# EAGLE board robert sullivan zoetrope brd (EAGLE 9.2.2)
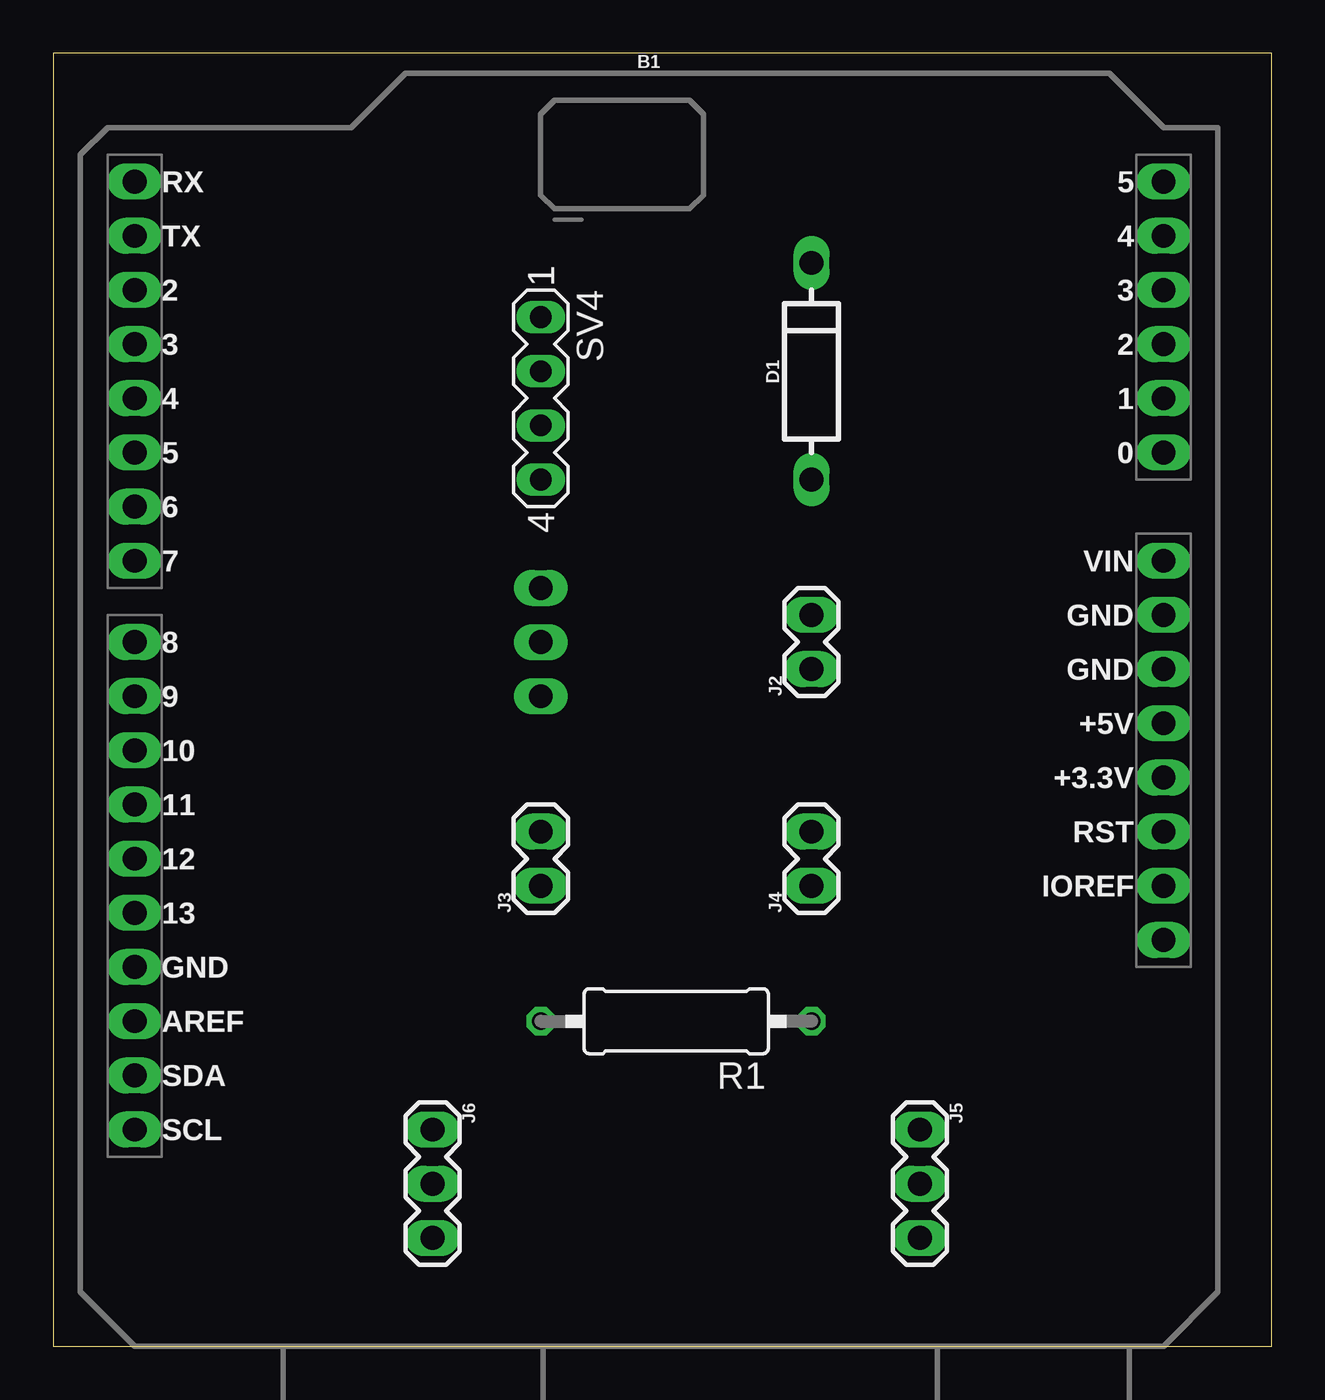
[diagram p0: board, top side]
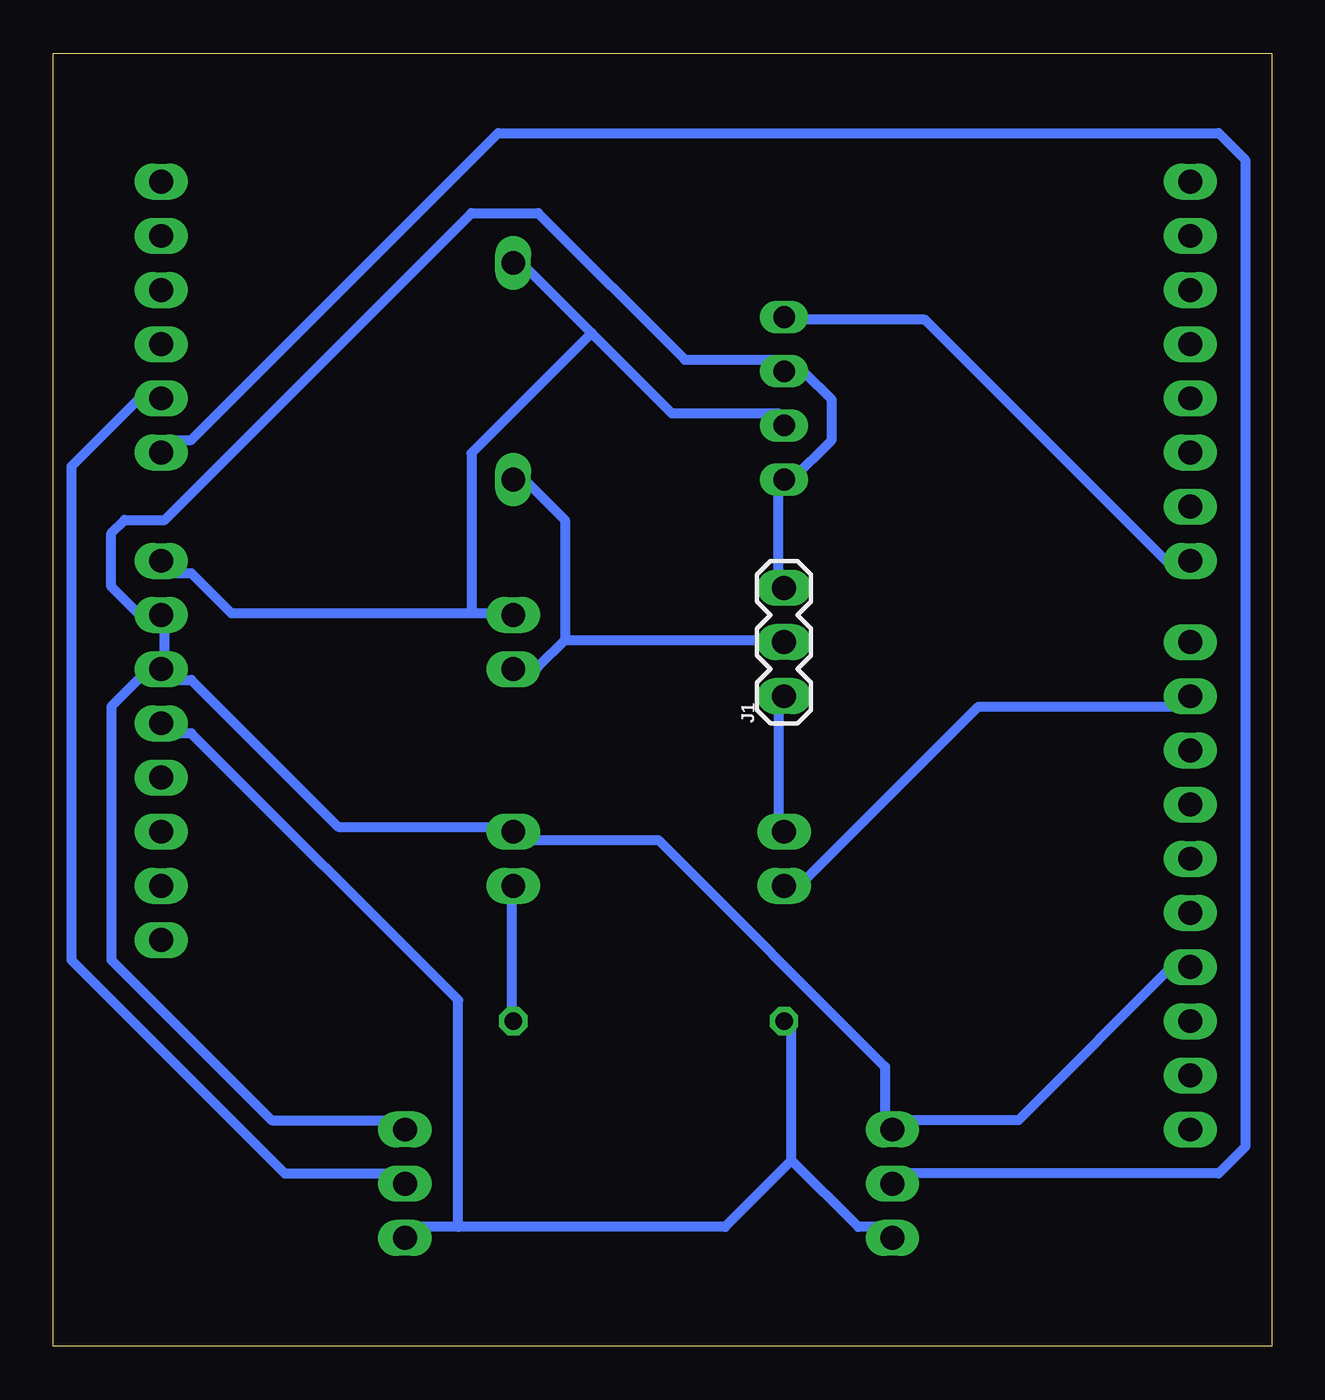
[diagram p1: board, bottom side, seen from below]

Size 57.13 x 60.63 mm. Coordinates in mm from the lower left corner, seen from the top.
Outline: 0,0 57.13,0 57.13,60.63 0,60.63 0,0
Copper layers (1*16): Top 0.035mm / dielectric 1.5mm / Bottom 0.035mm
Design rules "OthermillDRC_1_32_v2": minimum track width 8mil, minimum drill 0.8mm, track to track 0.794003125mm, track to pad 0.794003125mm, pad to pad 0.794003125mm, via to via 0.794003125mm, smd to smd 0mil, copper to edge 0mil, drill to drill 1mil, minimum pad ring 10mil, minimum via ring 10mil, stop-mask expansion 1mil, vias tented up to drill 30mil, thermal gap 10mil
Net classes: 0 default: width 0.457 mm, drill 0.457 mm, clearance 0.457 mm

## Footprints (pad centres in the part's own frame; a part is rotated, then mirrored left to right if it is on the bottom)
UNO_R3_SHIELD = drill 1.118 pad 1.676 long: 3.3V 24.13,-2.54; 5V 24.13,0; A0 24.13,12.7; A1 24.13,15.24; A2 24.13,17.78; A3 24.13,20.32; A4 24.13,22.86; A5 24.13,25.4; AREF -24.13,-13.97; D2 -24.13,20.32; D3 -24.13,17.78; D4 -24.13,15.24; D5 -24.13,12.7; D6 -24.13,10.16; D7 -24.13,7.62; D8 -24.13,3.81; D9 -24.13,1.27; D10 -24.13,-1.27; D11 -24.13,-3.81; D12 -24.13,-6.35; D13 -24.13,-8.89; GND@0 24.13,2.54; GND@1 24.13,5.08; GND@2 -24.13,-11.43; IOREF 24.13,-7.62; NC 24.13,-10.16; RES 24.13,-5.08; RX -24.13,25.4; SCL -24.13,-19.05; SDA -24.13,-16.51; TX -24.13,22.86; VIN 24.13,7.62
DIODE-1N4001 = drill 1.118 pad 1.676 long: A -5.08,0; C 5.08,0
1X03 = drill 1.118 pad 1.676 long: 1 0,0; 2 2.54,0; 3 5.08,0
1X02 = drill 1.118 pad 1.676 long: 1 0,0; 2 2.54,0
0309/12 = drill 0.813 octagon: 1 -6.35,0; 2 6.35,0
MA04-1 = drill 1.016 long: 1 -3.81,0; 2 -1.27,0; 3 1.27,0; 4 3.81,0

## Placement (x,y rotation side)
B1  ARDUINO_UNO_R3_SHIELDBASIC  [UNO_R3_SHIELD]  27.94,29.21 0 top
D1  1A/50V/1.1V  [DIODE-1N4001]  35.56,45.72 90 top
J1  455-1750-1-ND  [1X03]  22.86,30.48 90 bottom
J2  [1X02]  35.56,31.75 90 top
J3  [1X02]  22.86,21.59 90 top
J4  [1X02]  35.56,21.59 90 top
J5  455-1750-1-ND  [1X03]  40.64,10.16 270 top
J6  455-1750-1-ND  [1X03]  17.78,10.16 270 top
R1  [0309/12]  29.21,15.24 180 top
SV4  [MA04-1]  22.86,44.45 270 top

## Library data of the parts
B1 = SparkFun-Boards
D1 = SparkFun-DiscreteSemi; PROD_ID: DIO-09176
J1 J5 J6 = SparkFun-Connectors; PROD_ID: XXX-00000
J2-J4 = SparkFun-Connectors
R1 = rcl; SPICEPREFIX: R
SV4 = con-lstb; OC_FARNELL: unknown; OC_NEWARK: unknown

## Nets
5V: B1.5V J5.3 J6.3 R1.2
12V: B1.VIN D1.C J2.2 SV4.3
GND: B1.GND@0 B1.GND@1 B1.GND@2 J1.3 J4.2 J5.1 J6.1 SV4.2 SV4.4
N$1: B1.D7 SV4.1
N$2: B1.A1 J5.2
N$3: D1.A J1.2 J2.1
N$4: J1.1 J3.2
N$5: B1.D9 J3.1
N$6: B1.A0 J6.2
N$7: J4.1 R1.1

## Tracks (layer width: path | path; a pad name or v marks a point on that pad's centre or on a via)
5V
  Bottom 0.457: 22.5,8.72 22.5,14.98 R1.2 | 22.5,8.72 19.38,5.59 18.12,5.59 J6.3 | 38.14,5.59 25.63,5.59 22.5,8.72 | 38.14,5.59 40.02,5.59 J5.3 | 38.14,5.59 38.14,16.23 50.66,28.74 51.91,28.74 B1.5V
12V
  Bottom 0.457: 37.52,34.37 48.78,34.37 50.66,36.25 51.91,36.25 B1.VIN | 37.52,34.37 35.64,34.37 J2.2 | 31.89,47.51 35.02,50.64 D1.C | 31.89,47.51 28.13,43.75 23.13,43.75 SV4.3 | 37.52,34.37 37.52,41.88 31.89,47.51
GND
  Bottom 0.457: B1.GND@2 4.36,18.11 11.87,10.6 17.5,10.6 J6.1 18.12,10.6 18.12,13.1 28.76,23.73 35.02,23.73 J4.2 35.64,24.36 43.77,24.36 50.66,31.24 51.91,31.24 B1.GND@0 | J1.3 23.13,35.62 23.13,40.63 SV4.4 22.5,40.63 20.63,42.5 20.63,44.38 21.88,45.63 22.5,45.63 SV4.2 23.13,46.26 27.51,46.26 34.39,53.14 37.52,53.14 51.91,38.75 53.78,38.75 54.41,38.12 54.41,35.62 52.53,33.74 B1.GND@1 51.91,33.74 51.91,31.87 B1.GND@0 | J5.1 40.65,10.6 46.9,10.6 54.41,18.11 54.41,29.99 52.53,31.87 B1.GND@0
N$1
  Bottom 0.457: SV4.1 22.5,48.13 16.25,48.13 4.36,36.25 B1.D7
N$2
  Bottom 0.457: J5.2 40.65,8.1 46.28,8.1 56.28,18.11 56.28,41.25 52.53,45.01 B1.A1
N$3
  Bottom 0.457: 33.14,33.12 34.39,31.87 35.02,31.87 J2.1 | 33.14,33.12 33.14,38.75 35.02,40.63 D1.A | 33.14,33.12 23.13,33.12 J1.2
N$4
  Bottom 0.457: J3.2 23.13,24.36 23.13,29.99 J1.1
N$5
  Bottom 0.457: B1.D9 4.36,29.99 13.74,29.99 22.5,21.23 J3.1
N$6
  Bottom 0.457: J6.2 17.5,8.1 2.48,8.1 1.23,9.35 1.23,55.64 2.48,56.89 36.27,56.89 50.66,42.5 51.91,42.5 B1.A0
N$7
  Bottom 0.457: R1.1 35.64,15.6 35.64,21.23 J4.1